# Altium PCB Main.PcbDoc
Units mm, origin at the board's own origin, x right, y up, seen from the top; angles counter-clockwise.
Board outline 99 x 99 mm, 4 copper layers (Top Layer, Ground Layer, Power Layer, Bottom Layer), stack 1.591 mm thick; 68 components, 49 nets, 281 pads, 50 vias.
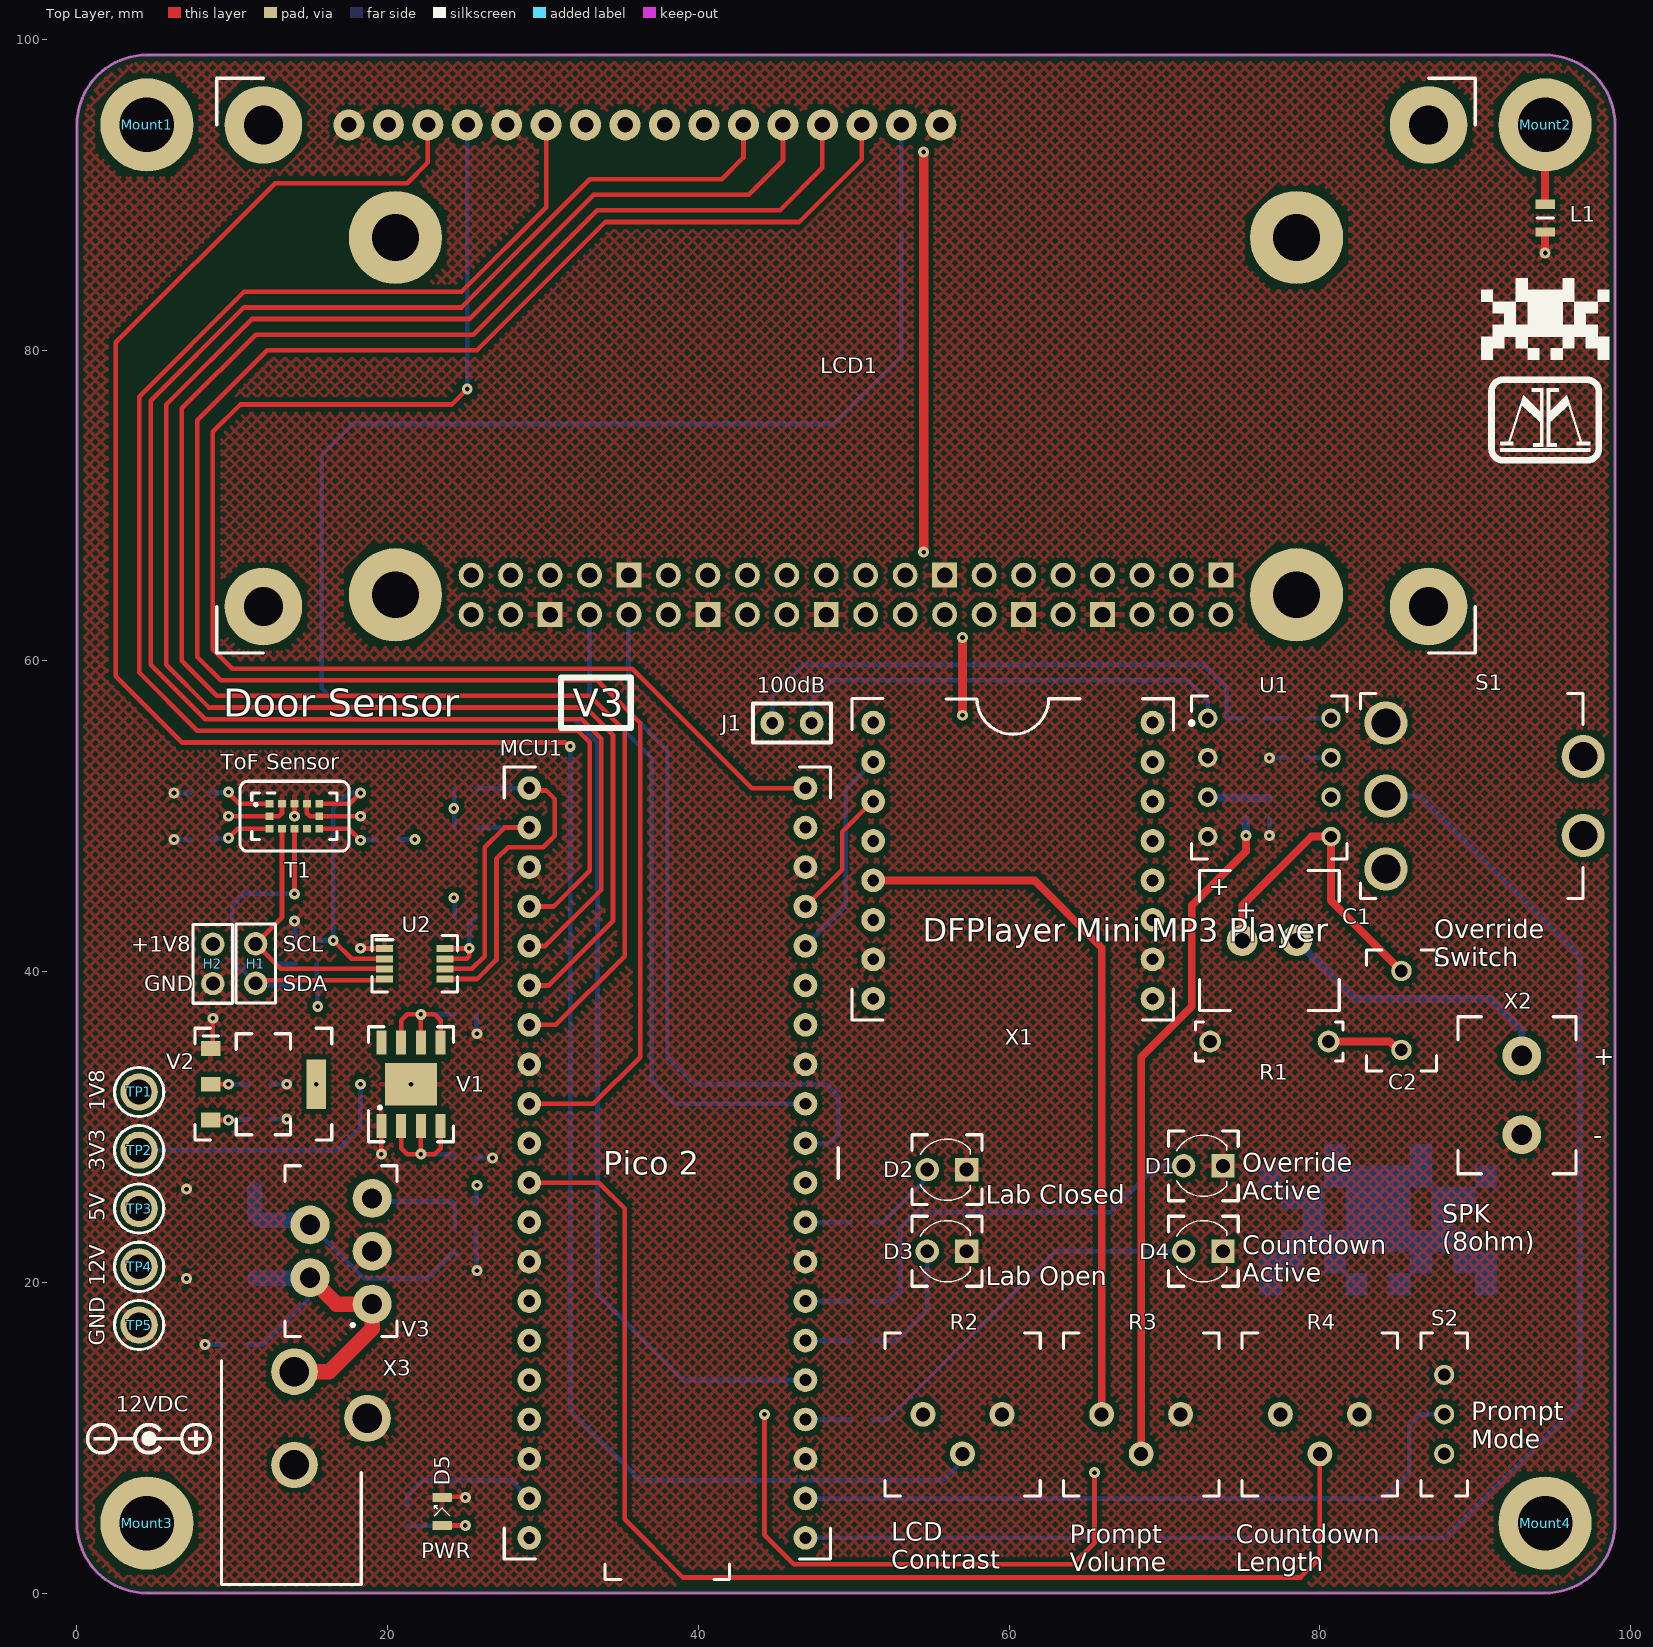
[diagram p0: Top Layer view]
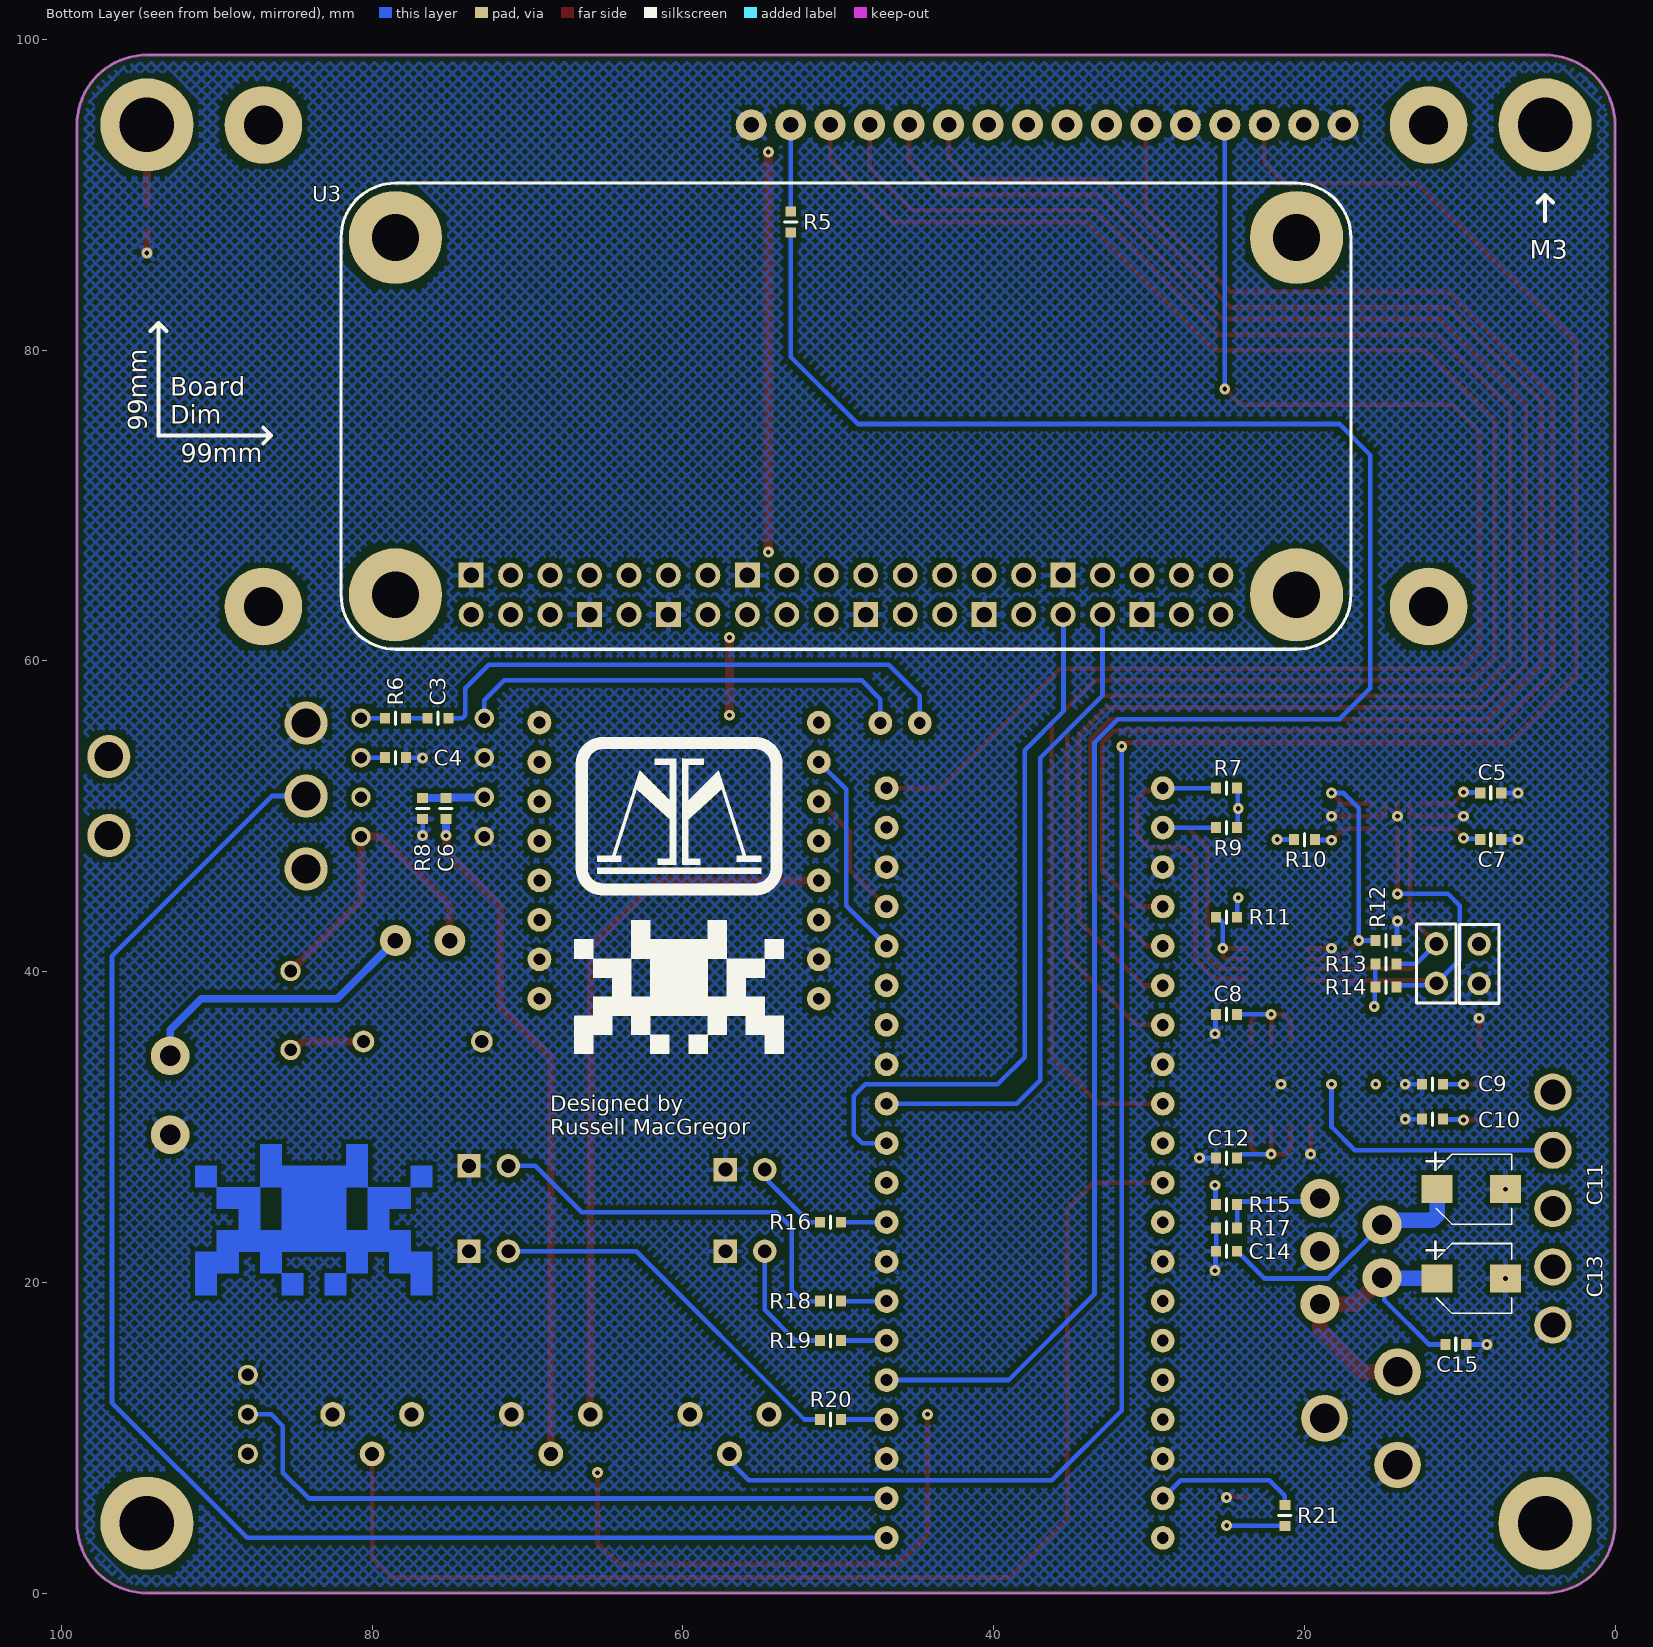
[diagram p1: Bottom Layer view, seen from below]
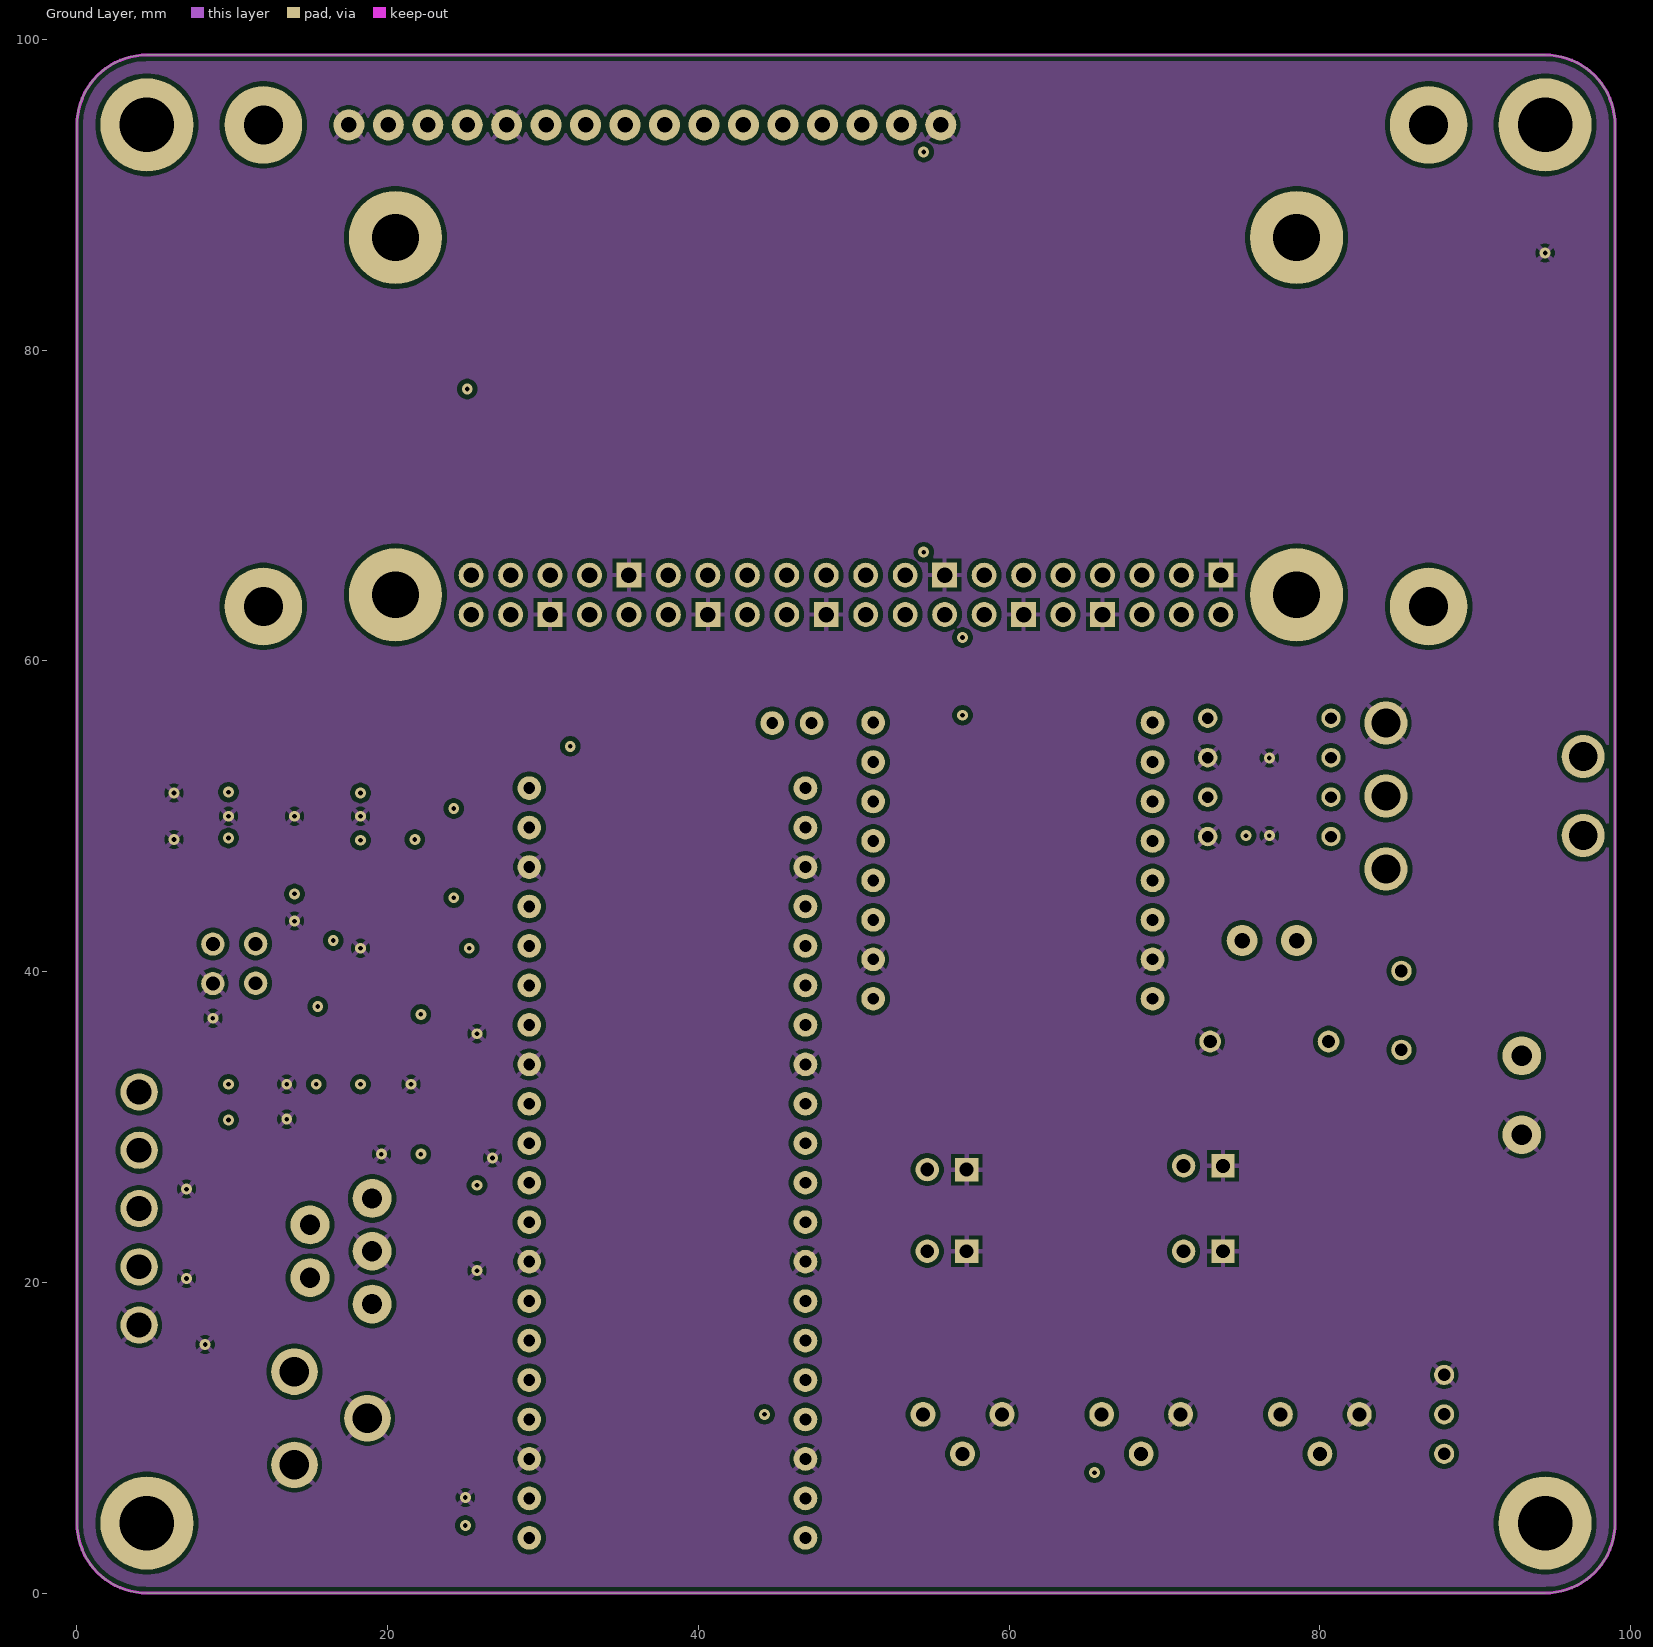
[diagram p2: Ground Layer]
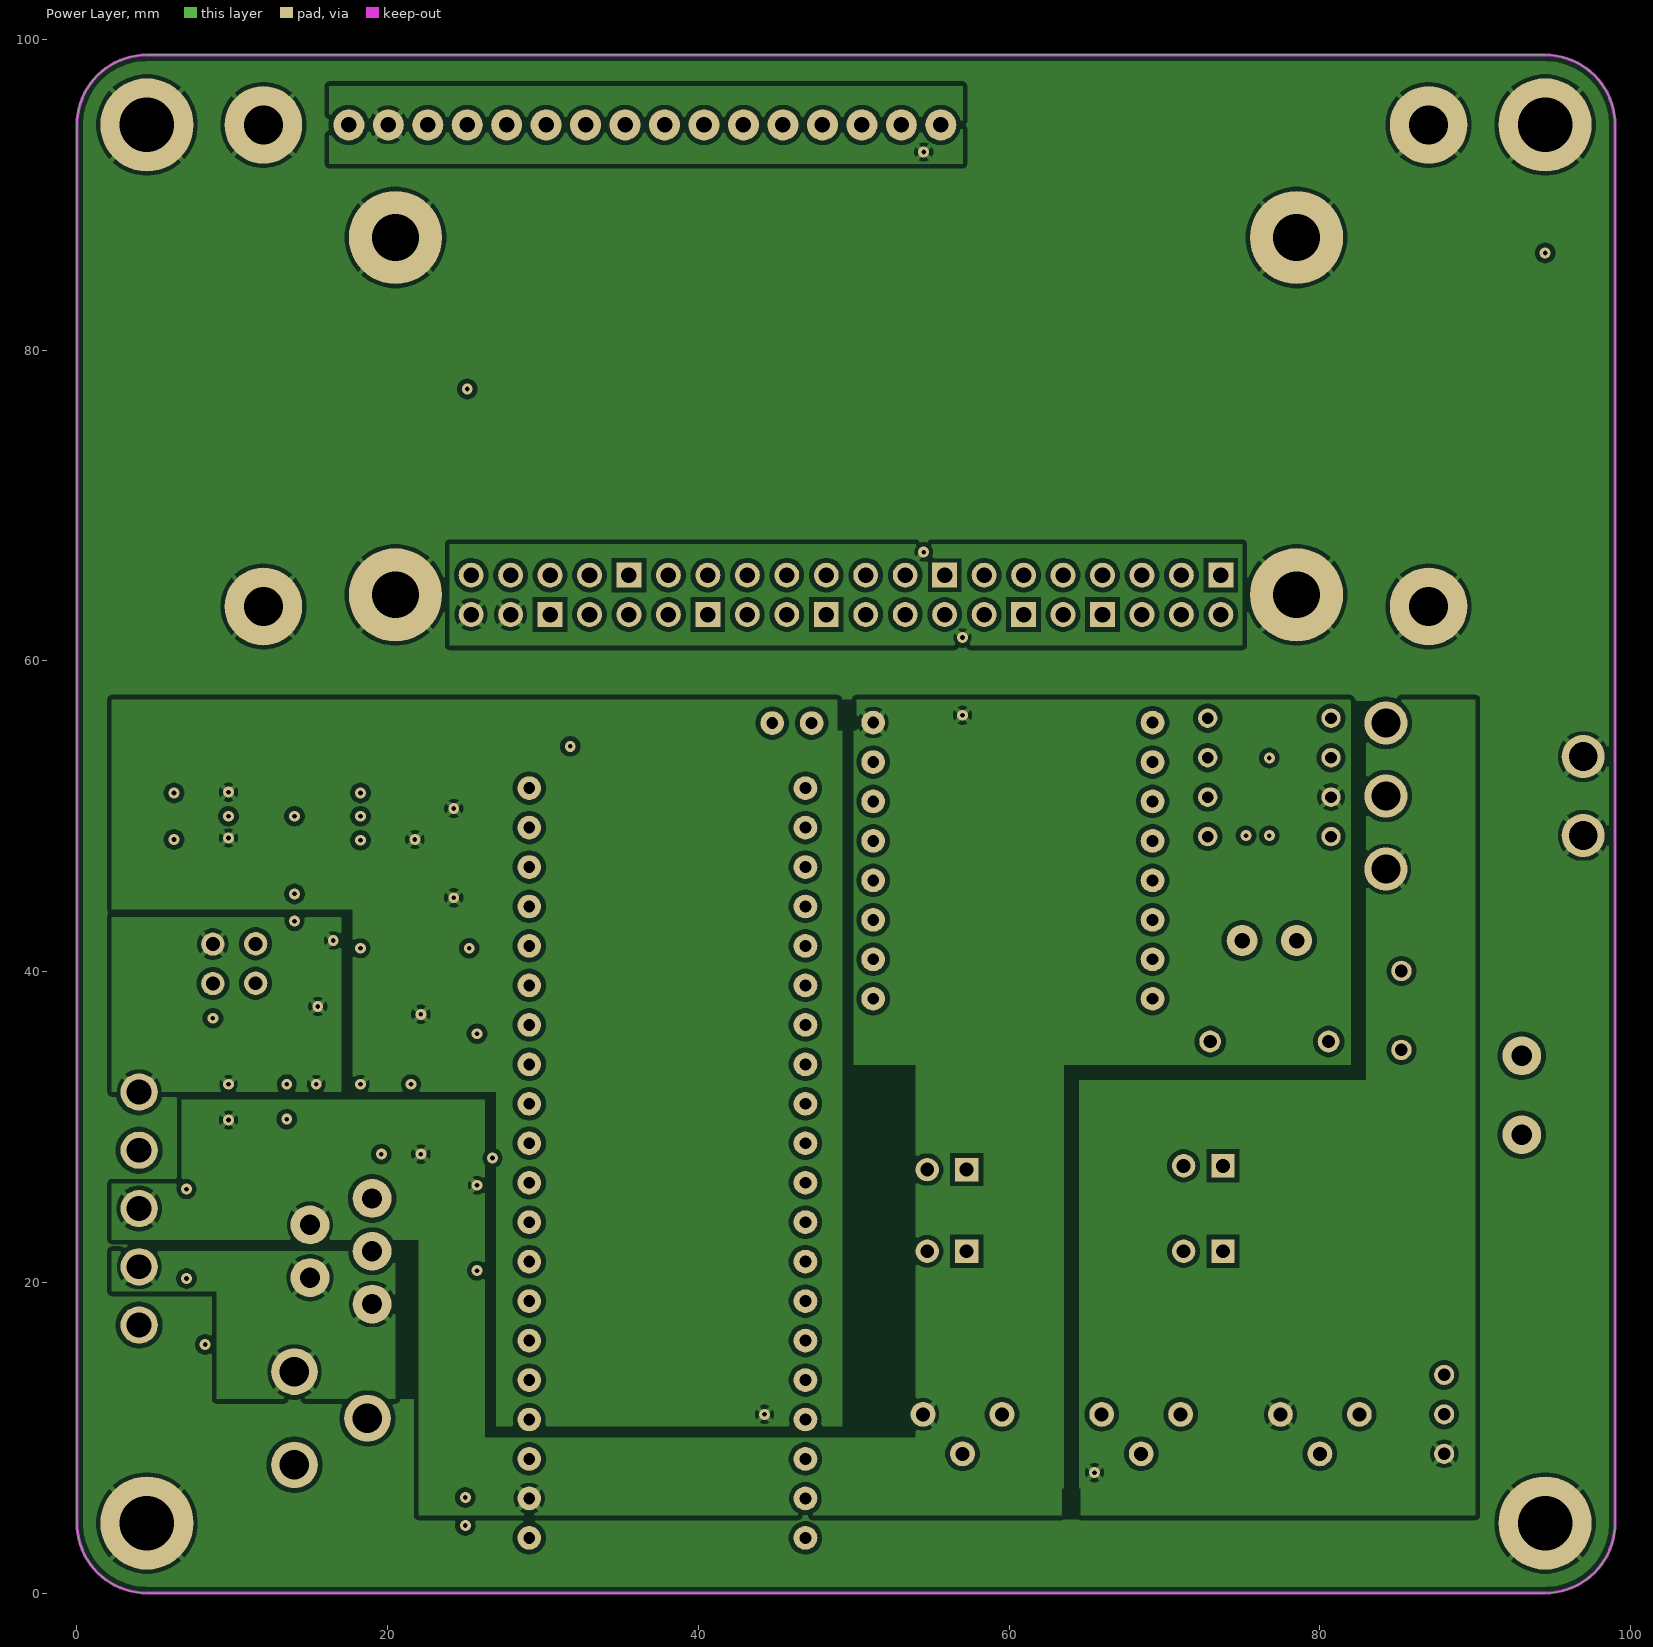
[diagram p3: Power Layer]

## Layer stack, top to bottom
Top Solder: solder mask 0.0102, Solder Resist, Dk 3.8
Top Layer: signal copper 0.035
Dielectric 2: prepreg 0.2104, 7628*1, Dk 4.4
Ground Layer: signal copper 0.0175
Dielectric 1: dielectric 1.065, FR-4, Dk 4.8
Power Layer: signal copper 0.0175
Dielectric 3: prepreg 0.2104, 7628*1, Dk 4.4
Bottom Layer: signal copper 0.035
Bottom Solder: solder mask 0.0102, Solder Resist, Dk 3.8

## Board outline
0,4.5 0,94.5 cw(c4.5,94.5) 4.5,99 94.5,99 cw(c94.5,94.5) 99,94.5 99,4.5 cw(c94.5,4.5) 94.5,0 4.5,0 cw(c4.5,4.5)

## Design rules (kind name [scope] priority, off if disabled: settings)
BoardOutlineClearance [All] p1: gap=0.2 ignorepadtopadclearanceinfootprint=FALSE
Clearance "inPolygon Clearance" [InPolygon] p1: gap=0.3 ignorepadtopadclearanceinfootprint=TRUE // this rule ensures that every net within a polygon of a different net has a set clearance from the poly
Clearance "Different Diff Pair" [All] p2: gap=0.2 ignorepadtopadclearanceinfootprint=TRUE
Clearance "Same Diff Pair" [All] p3: gap=0.1 ignorepadtopadclearanceinfootprint=TRUE
Clearance "Different Nets" [not InAnyDifferentialPair] p4: gap=0.3 ignorepadtopadclearanceinfootprint=TRUE except(0.1: Arc-SMDPad Arc-THPad Arc-Via Arc-Text Track-SMDPad Track-THPad Track-Via Track-Text SMDPad-Text THPad-Text Via-Text Fill-Text Poly-Text Region-Text Text-Text; 0.12: Arc-Arc Arc-Track Track-Track; 0.15: SMDPad-SMDPad SMDPad-THPad SMDPad-Via THPad-THPad THPad-Via Via-Via; 0.2: Arc-Hole Track-Hole SMDPad-Hole THPad-Hole Via-Hole Fill-Hole Poly-Hole Region-Hole Text-Hole)
Clearance "Same Net" [not InAnyDifferentialPair] p5: gap=0 ignorepadtopadclearanceinfootprint=TRUE except(0.1: THPad-Via; 0.18: Arc-Arc Arc-Track Track-Track)
ComponentClearance [All] p1: gap=0.102 collisioncheckmode=3 verticalgap=0.102 showdistances=TRUE
DiffPairsRouting "Ethernet Routing" [InDifferentialPairClass('Ethernet_Pairs')] p1: maxlimit=0.25 minlimit=0.2 mostfreqgap=0.25 toplayer_maxgap=0.2 toplayer_prefgap=0.2 toplayer_minwidth=0.25 toplayer_maxwidth=0.25 toplayer_prefwidth=0.25 midlayer1_mingap=0.25 midlayer1_minwidth=0.19 midlayer1_maxwidth=0.19 midlayer1_prefwidth=0.19 midlayer2_mingap=0.25 midlayer2_minwidth=0.19 midlayer2_maxwidth=0.19 midlayer2_prefwidth=0.19 bottomlayer_maxgap=0.2 bottomlayer_prefgap=0.2 bottomlayer_minwidth=0.25 bottomlayer_maxwidth=0.25 bottomlayer_prefwidth=0.25 impedanceprofiledriven=TRUE maxuncoupledlength=12.7
DiffPairsRouting "USB Routing" [InDifferentialPairClass('USB_Pairs')] p2: maxlimit=0.291 minlimit=0.127 mostfreqgap=0.291 toplayer_maxgap=0.127 toplayer_prefgap=0.127 toplayer_minwidth=0.23 toplayer_maxwidth=0.23 toplayer_prefwidth=0.23 midlayer1_mingap=0.291 midlayer1_minwidth=0.25 midlayer1_maxwidth=0.25 midlayer1_prefwidth=0.25 midlayer2_mingap=0.291 midlayer2_minwidth=0.25 midlayer2_maxwidth=0.25 midlayer2_prefwidth=0.25 bottomlayer_maxgap=0.127 bottomlayer_prefgap=0.127 bottomlayer_minwidth=0.23 bottomlayer_maxwidth=0.23 bottomlayer_prefwidth=0.23 impedanceprofiledriven=TRUE maxuncoupledlength=12.7
DiffPairsRouting "CAN Routing" [InDifferentialPairClass('CAN_Pairs')] p3: maxlimit=0.907 minlimit=0.5 mostfreqgap=0.907 toplayer_maxgap=0.5 toplayer_prefgap=0.5 toplayer_minwidth=0.201 toplayer_maxwidth=0.201 toplayer_prefwidth=0.201 midlayer1_mingap=0.907 midlayer1_minwidth=0.155 midlayer1_maxwidth=0.155 midlayer1_prefwidth=0.155 midlayer2_mingap=0.907 midlayer2_minwidth=0.155 midlayer2_maxwidth=0.155 midlayer2_prefwidth=0.155 bottomlayer_maxgap=0.5 bottomlayer_prefgap=0.5 bottomlayer_minwidth=0.201 bottomlayer_maxwidth=0.201 bottomlayer_prefwidth=0.201 maxuncoupledlength=12.7
Height [All] p1: minheight=0 maxheight=1816.048 prefheight=12.7
HoleSize [All] p1: absolutevalues=TRUE maxlimit=6.3 minlimit=0.3 maxpercent=80.000 minpercent=20.000
HoleToHoleClearance [All] p1: gap=0.25 allowstackedmicrovias=FALSE
Length [All] p1: maxlimit=43.432 minlimit=0 usedelayunits=TRUE mindelay=0.000000 maxdelay=10000.000000
MatchedLengths "Diff Pair Matched Delays" [InDifferentialPairClass('Ethernet_Pairs') or InDifferentialPairClass('USB_Pairs') or InDifferentialPairClass('CAN_Pairs')] p1: tolerance=5 checknetsindiffpair=TRUE checkdiffpairvsdiffpair=FALSE checkxsignals=FALSE checkothers=FALSE usedelayunits=TRUE delaytolerance=100.000000
MinimumAnnularRing [All] p1: minimumring=0.2
MinimumSolderMaskSliver [All] p1: minsoldermaskwidth=0
PlaneClearance "Supply Net Clearance" [InNetClass('Supply_Nets')] p1: clearance=0.5
PlaneClearance "All Nets" [All] p2: clearance=0.3
PolygonConnect "Supply Nets" [InNetClass('Supply_Nets')] p1: connectstyle=Relief reliefconductorwidth=0.3 reliefentries=4 polygonreliefangle="90 Angle" conductorbypadedge=TRUE mindistance=0.381 enablemindistance=FALSE airgapwidth=0.254
PolygonConnect General [All] p2: connectstyle=Relief reliefconductorwidth=0.254 reliefentries=4 polygonreliefangle="90 Angle" airgapwidth=0.254
RoutingVias [All] p1: holewidth=0.2 width=0.35 viastyle="Through Hole" minholewidth=0.15 minwidth=0.3 maxholewidth=6.3 maxwidth=6.55
SilkToSilkClearance [All] p1: silktosilkclearance=0
SilkToSolderMaskClearance [All] p1: minsilkscreentomaskgap=0 clearancetoexposedcopper=TRUE
SolderMaskExpansion [All] p1: expansion=0.075 istentingtop=FALSE
SupplyNets "Schematic Supply Nets_9" [InNet('+1V8')] p1: voltage=0.000
SupplyNets "Schematic Supply Nets_5" [InNet('+12V')] p2: voltage=0.000
SupplyNets "Schematic Supply Nets_3" [InNet('GND')] p3: voltage=0.000
SupplyNets "Schematic Supply Nets_2" [InNet('+5V')] p4: voltage=0.000
SupplyNets "Schematic Supply Nets_7" [InNet('+3V3')] p5: voltage=0.000
SupplyNets "Schematic Supply Nets_1" [InNet('Earth')] p6: voltage=0.000
UnRoutedNet [All] p1: checkbadconnections=TRUE
Width "nRF Width" [InNetClass('nRF Signal')] p1: maxlimit=0.379 minlimit=0.263 preferedwidth=0.379 toplayer_minwidth=0.379 midlayer1_maxwidth=0.263 midlayer1_prefwidth=0.263 midlayer2_maxwidth=0.263 midlayer2_prefwidth=0.263 bottomlayer_minwidth=0.379 impedanceprofiledriven=TRUE minimp=50.000000 maximp=50.000000 favimp=50.000000 checkconnectedcopper=TRUE
Width [All] p2: maxlimit=100 minlimit=0.1 preferedwidth=0.3
20 further rules are at their usual default settings.

## Classes and differential pairs
component class "Output Devices": C1 C2 C3 C4 C6 D1 D2 D3 D4 D5 J1 LCD1 R1 R2 R3 R5 R6 R8 R16 R18 R19 R20 R21 U1 X1
net class Supply_Nets: +1V8 +3V3 +5V +12V Earth GND NetR15_1
component class Power: C8 C9 C10 C11 C12 C13 C14 C15 R15 R17 TP1 TP2 TP3 TP4 TP5 V1 V2 V3
component class "Input Devices": C5 C7 H1 H2 R4 R7 R9 R10 R11 R12 R13 R14 S1 S2 T1 U2
component class Controllers: MCU1 U3
component class Connections: L1 Mount1 Mount2 Mount3 Mount4 X2 X3 X?

## Components (designator, comment, footprint, x,y, rotation, side; value= is the part's Value field where it differs from the comment)
C1 "[Cap] Thru-Hole 270uF 20% 35V" "[Cap] Thru-Hole Polarized 8mm" 76.75,42 r0 top
C2 "[Cap] Thru-Hole 47nF 20% 50V" "[Cap] Thru-Hole Nonpolarized Ceramic" 85.25,37.5 r90 top
C3 "[Cap] 0603 10uF 20% 16V" "[Cap] SMD 0603" 75.75,56.31 r0 bottom
C4 "[Cap] 0603 0.1uF 10% 16V" "[Cap] SMD 0603" 78.5,53.77 r180 bottom
C5 "[Cap] 0603 0.1uF 10% 16V" "[Cap] SMD 0603" 8,51.5 r0 bottom
C6 "[Cap] 0603 0.1uF 10% 16V" "[Cap] SMD 0603" 75.25,50.5 r270 bottom
C7 "[Cap] 0603 4.7uF 10% 25V" "[Cap] SMD 0603" 8,48.5 r0 bottom
C8 "[Cap] 0603 10uF 20% 16V" "[Cap] SMD 0603" 25,37.25 r180 bottom
C9 "[Cap] 0603 10uF 20% 16V" "[Cap] SMD 0603" 11.75,32.75 r180 bottom
C10 "[Cap] 0603 10uF 20% 16V" "[Cap] SMD 0603" 11.75,30.5 r180 bottom
C11 "[Cap] 4mm 47uF 20% 50V" "[Cap] SMD Polarized, 4mm" 9.25,26 r180 bottom
C12 "[Cap] 0603 0.1uF 10% 16V" "[Cap] SMD 0603" 25,28 r180 bottom
C13 "[Cap] 4mm 47uF 20% 50V" "[Cap] SMD Polarized, 4mm" 9.25,20.25 r180 bottom
C14 "[Cap] 0603 10uF 20% 16V" "[Cap] SMD 0603" 25,22 r180 bottom
C15 "[Cap] 0603 0.1uF 10% 16V" "[Cap] SMD 0603" 10.25,16 r0 bottom
D1 "[LED] Thru-Hole 3mm Yellow" "[LED] Thru-Hole 3mm Yellow" 72.5,27.5 r0 top
D2 "[LED] Thru-Hole 3mm Red" "[LED] Thru-Hole 3mm Red" 56,27.25 r0 top
D3 "[LED] Thru-Hole 3mm Green" "[LED] Thru-Hole 3mm Green" 56,22 r0 top
D4 "[LED] Thru-Hole 3mm White" "[LED] Thru-Hole 3mm White" 72.5,22 r0 top
D5 "[LED] SMD 0805 Green" "[LED] SMD 0805" 23.5,5.25 r90 top
H1 "1x2 Header" "[Header] 1x2 Male" 11.5,40.52 r90 top
H2 "1x2 Header" "[Header] 1x2 Male" 8.75,40.5 r270 top
J1 "[Jumper] Thru-Hole 2pin" "[Jumper] Thru-Hole 2pin" 47.29,56 r180 top
L1 "652-MH2029-300Y" "[Ferrite] SMD 0805" 94.5,88.5 r270 top
LCD1 "16x2, no I2C backpack" "[LCD] 16x2 Parallel" 9.5,61 r0 top
MCU1 "Pico 2" "[Pi] Pico 2" 38,2.18 r180 top
Mount1 "M3 Mount Hole" "[Mount] M3 Mount Hole" 4.5,94.5 r0 top
Mount2 "M3 Mount Hole" "[Mount] M3 Mount Hole" 94.5,94.5 r0 top
Mount3 "M3 Mount Hole" "[Mount] M3 Mount Hole" 4.5,4.5 r0 top
Mount4 "M3 Mount Hole" "[Mount] M3 Mount Hole" 94.5,4.5 r0 top
R1 "[10] Thru-Hole 5% 1/4W" "[Res] Thru-Hole 1/4W" 76.75,35.5 r0 top
R2 "0-10k, 0.5W" "[Potentiometer] 10k 0.5W (2)" 57,11.5 r0 top
R3 "0-10k, 0.5W" "[Potentiometer] 10k 0.5W (2)" 68.5,11.5 r0 top
R4 "0-10k, 0.5W" "[Potentiometer] 10k 0.5W (2)" 80,11.5 r0 top
R5 "[100] SMD 0603 1% 1/10W" "[Res] SMD 0603" 53.06,88.25 r90 bottom
R6 "[680] SMD 0603 1% 1/8W" "[Res] SMD 0603" 78.5,56.31 r0 bottom
R7 "[10k] SMD 0603 1% 1/8W" "[Res] SMD 0603" 25,51.81 r180 bottom
R8 "[15k] SMD 0603 1% 1/8W" "[Res] SMD 0603" 76.75,50.5 r90 bottom
R9 "[10k] SMD 0603 1% 1/8W" "[Res] SMD 0603" 25,49.27 r180 bottom
R10 "[10k] SMD 0603 1% 1/8W" "[Res] SMD 0603" 20,48.5 r0 bottom
R11 "[200k] SMD 0603 1% 1/10W" "[Res] SMD 0603" 25,43.5 r0 bottom
R12 "[300k] SMD 0603 1% 1/10W" "[Res] SMD 0603" 14.75,42 r0 bottom
R13 "[10k] SMD 0603 1% 1/8W" "[Res] SMD 0603" 14.75,40.5 r0 bottom
R14 "[10k] SMD 0603 1% 1/8W" "[Res] SMD 0603" 14.75,39 r0 bottom
R15 "[10k] SMD 0603 1% 1/8W" "[Res] SMD 0603" 25,25 r0 bottom
R16 "[220] SMD 0603 1% 1/10W" "[Res] SMD 0603" 50.5,23.87 r0 bottom
R17 "[3.3k] SMD 0603 1% 1/10W" "[Res] SMD 0603" 25,23.5 r180 bottom
R18 "[220] SMD 0603 1% 1/10W" "[Res] SMD 0603" 50.5,18.79 r0 bottom
R19 "[220] SMD 0603 1% 1/10W" "[Res] SMD 0603" 50.5,16.25 r0 bottom
R20 "[220] SMD 0603 1% 1/10W" "[Res] SMD 0603" 50.5,11.17 r0 bottom
R21 "[220] SMD 0603 1% 1/10W" "[Res] SMD 0603" 21.25,5 r270 bottom
S1 "[SPDT] Toggle" "[SPDT] Toggle" 84.25,51.3 r270 top
S2 "[SPDT] Slide Switch" "[SPDT] Slide Switch" 88,11.5 r270 top
T1 "[ToF] VL53L1X" "[ToF] VL53L1X" 14,50 r0 top
TP1 "[THM] Thru-Hole" "[THM] White" 4,32.25 r0 top
TP2 "[THM] Thru-Hole" "[THM] White" 4,28.5 r0 top
TP3 "[THM] Thru-Hole" "[THM] White" 4,24.75 r0 top
TP4 "[THM] Thru-Hole" "[THM] White" 4,21 r0 top
TP5 "[THM] Thru-Hole" "[THM] White" 4,17.25 r0 top
U1 "LM386" "[Amp] LM386" 76.75,52.5 r0 top
U2 "[Level Shifter] I2C Level Shifter" "[Level Shifter] I2C Level Shifter" 21.75,40.5 r0 top
U3 "RP Zero 2W" "[Pi] Zero 2W" 17,90.75 r0 bottom
V1 "3V3 1.5A" "[Linear] 3V3 1.5A" 21.5,32.75 r90 top
V2 "[Linear] 1.8V 1A" "[Linear] 1.8V 1A" 12,32.75 r0 top
V3 "[Linear] 1.25-25V 3A" "[Linear] 1.25-25V 3A" 19,22 r90 top
X1 "[MP3] DFPlayer Mini MP3 Player" "[MP3] DFPlayer Mini MP3 Player" 51.25,38.25 r0 top
X2 "2pin Screw Terminal" "[Screw Terminal] 2pin 5mm" 93,32 r90 top
X3 "[Barrel] DC Jack 2mmID" "[Barrel] DC Jack" 14,8.25 r0 top

## Footprints (in the part's own frame and the unit in brackets; to place one, negate y for a bottom-side part, rotate by r counter-clockwise, add the part's x,y. Pads: shape width x height; smd on the part's side, far side on the other; paste and mask are expansions set on the pad)
"[Amp] LM386" [mm] "LM386N-1/NOPB"
  round 1.25 hole 0.75: 1(-3.969,3.81) 2(-3.969,1.27) 3(-3.969,-1.27) 4(-3.969,-3.81) 5(3.969,-3.81) 6(3.969,-1.27) 7(3.969,1.27) 8(3.969,3.81)
  silkscreen extent -5.1,-5.25 5,5.25, body extent -4.1,-5.08 4.1,5.08, height 3.94
"[Barrel] DC Jack" [mm]
  round 3 hole 1.9: 1(0,6) 2(0,0) 3(4.7,3)
  silkscreen extent -4.7,-7.7 4.3,6.7, body extent -4.42,-7.7 4.98,6.7, height 11.04
"[Cap] SMD 0603" [mm]
  rect 0.65x0.7 smd: 1(-0.675,0) 2(0.675,0)
  silkscreen extent 0,-0.4 0,0.4, body extent -0.8,-0.45 0.8,0.45, height 0.8
"[Cap] SMD Polarized, 4mm" [mm]
  rect 2x1.8 smd: 1(-2.2,0) 2(2.2,0)
  silkscreen extent -2.25,-2.25 2.6,2.25, body extent -2.6,-2.25 2.6,2.25, height 5.66
"[Cap] Thru-Hole Nonpolarized Ceramic" [mm]
  round 1.316 hole 0.81: 1(-2.54,0) 2(2.54,0)
  silkscreen extent -3.9,-2.25 3.9,2.25, body extent -3.55,-2.04 3.56,2.04, height 10.23
"[Cap] Thru-Hole Polarized 8mm" [mm]
  round 2 hole 1: 1(-1.75,0) 2(1.75,0)
  silkscreen extent -4.5,-4.5 4.5,4.5, body extent -4.24,-4.25 4.24,4.25, height 17.5
"[Ferrite] SMD 0805" [mm]
  rect 0.6x1.25 smd: 1(-0.9,0) 2(0.9,0)
  silkscreen extent 0,-0.53 0,0.53, body extent -1,-0.6 1,0.6, height 1.1
"[Header] 1x2 Male" [mm]
  round 1.5 hole 0.9: 1(-1.27,0) 2(1.27,0)
  silkscreen extent -2.54,-1.27 2.54,1.27, body extent -2.54,-1.27 2.54,1.27, height 9.5
"[Jumper] Thru-Hole 2pin" [mil]
  round 60 hole 30: 1(0,0) 2(100,0)
  silkscreen extent -49,-49 149,49, body extent -50,-50 150,50, height 374
"[LCD] 16x2 Parallel" [mm]
  round 2 hole 1: 1(8,33.5) 2(10.54,33.5) 3(13.08,33.5) 4(15.62,33.5) 5(18.16,33.5) 6(20.7,33.5) 7(23.24,33.5) 8(25.78,33.5) 9(28.32,33.5) 10(30.86,33.5) 11(33.4,33.5) 12(35.94,33.5) 13(38.48,33.5) 14(41.02,33.5) 15(43.56,33.5) 16(46.1,33.5)
  round 5 hole 2.5: MH(2.5,2.5) MH(2.5,33.5) MH(77.5,2.5) MH(77.5,33.5)
  silkscreen extent -0.5,-0.5 80.5,36.5, body extent 0,0 80,36, height 10.9
"[LED] SMD 0805" [mm]
  rrect20% 0.6x1.25 smd: 1(-0.9,0) 2(0.9,0)
  silkscreen extent -0.28,-0.51 0.37,0.51, body extent -1,-0.65 1,0.65, height 0.8
"[LED] Thru-Hole 3mm Green" [mm]
  round 1.5 hole 0.9: 1(-1.27,0)
  rect 1.5x1.5 hole 0.9: 2(1.27,0)
  silkscreen extent -2.25,-2.25 2.25,2.25, body extent -1.9,-1.92 1.68,1.92, height 5.6
"[LED] Thru-Hole 3mm Red" [mm]
  round 1.5 hole 0.9: 1(-1.27,0)
  rect 1.5x1.5 hole 0.9: 2(1.27,0)
  silkscreen extent -2.25,-2.25 2.25,2.25, body extent -1.88,-1.92 1.68,1.92, height 5.6
"[LED] Thru-Hole 3mm White" [mm]
  round 1.5 hole 0.9: 1(-1.27,0)
  rect 1.5x1.5 hole 0.9: 2(1.27,0)
  silkscreen extent -2.25,-2.25 2.25,2.25, body extent -1.88,-1.92 1.68,1.92, height 5.6
"[LED] Thru-Hole 3mm Yellow" [mm]
  round 1.5 hole 0.9: 1(-1.27,0)
  rect 1.5x1.5 hole 0.9: 2(1.27,0)
  silkscreen extent -2.25,-2.25 2.25,2.25, body extent -1.88,-1.92 1.68,1.92, height 5.6
"[Level Shifter] I2C Level Shifter" [mm] "PCA9306DCTR"
  rect 1.1x0.45 smd: 1(-1.95,0.975) 2(-1.95,0.325) 3(-1.95,-0.325) 4(-1.95,-0.975) 5(1.95,-0.975) 6(1.95,-0.325) 7(1.95,0.325) 8(1.95,0.975)
  silkscreen extent -2.75,-1.83 2.75,1.83, body extent -2,-1.48 2,1.48, height 1.3
"[Linear] 1.8V 1A" [mm] "NCP1117IST18T3G"
  rect 1.25x0.95 smd: 1(-3.4,2.3) 2(-3.4,0) 3(-3.4,-2.3)
  rect 1.25x3.2 smd: 2(3.4,0)
  silkscreen extent -4.4,-3.6 4.4,3.6, body extent -3.5,-3.25 3.5,3.25, height 1.8
"[Linear] 1.25-25V 3A" [mm] "MIC29302WT"
  round 2.5 hole 1.3: 1(-3.4,0) 2(-1.7,4) 3(0,0) 4(1.7,4) 5(3.4,0)
  silkscreen extent -5.5,-1.6 5.5,5.6, body extent -5.12,-0.13 5.11,8.58, height 21.54
"[Linear] 3V3 1.5A" [mm]
  rect 1.525x0.65 smd: 1(-2.688,1.905) 2(-2.688,0.635) 3(-2.688,-0.635) 4(-2.688,-1.905) 5(2.688,-1.905) 6(2.688,-0.635) 7(2.688,0.635) 8(2.688,1.905)
  rect 2.71x3.35 smd: 9(0,0)
  silkscreen extent -3.7,-2.73 3.7,2.73, body extent -3,-2.45 3,2.45, height 1.5
"[Mount] M3 Mount Hole" [mm]
  round 6 hole 3.5: 1(0,0)
"[MP3] DFPlayer Mini MP3 Player" [mil]
  round 60 hole 30: 1(0,700) 2(0,600) 3(0,500) 4(0,400) 5(0,300) 6(0,200) 7(0,100) 8(0,0) 9(707.87,0) 10(707.87,100) 11(707.87,200) 12(707.87,300) 13(707.87,400) 14(707.87,500) 15(707.87,600) 16(707.87,700)
  silkscreen extent -54,-54 761,761, body extent -51,-164 768,760, height 236
"[Pi] Pico 2" [mil]
  round 60 hole 30: 1(-350,-53.94) 2(-350,-153.94) 3(-350,-253.94) 4(-350,-353.94) 5(-350,-453.94) 6(-350,-553.94) 7(-350,-653.94) 8(-350,-753.94) 9(-350,-853.94) 10(-350,-953.94) 11(-350,-1053.94) 12(-350,-1153.94) 13(-350,-1253.94) 14(-350,-1353.94) 15(-350,-1453.94) 16(-350,-1553.94) 17(-350,-1653.94) 18(-350,-1753.94) 19(-350,-1853.94) 20(-350,-1953.94) 21(350,-1953.94) 22(350,-1853.94) 23(350,-1753.94) 24(350,-1653.94) 25(350,-1553.94) 26(350,-1453.94) 27(350,-1353.94) 28(350,-1253.94) 29(350,-1153.94) 30(350,-1053.94) 31(350,-953.94) 32(350,-853.94) 33(350,-753.94) 34(350,-653.94) 35(350,-553.94) 36(350,-453.94) 37(350,-353.94) 38(350,-253.94) 39(350,-153.94) 40(350,-53.94)
  silkscreen extent -433,-2008 413,51, body extent -413,-2008 413,43, height 287
"[Pi] Zero 2W" [mm]
  round 1.6 hole 1: 1(8.37,25.23) 3(10.91,25.23) 5(13.45,25.23) 7(15.99,25.23) 8(15.99,27.77) 10(18.53,27.77) 11(21.07,25.23) 12(21.07,27.77) 13(23.61,25.23) 15(26.15,25.23) 16(26.15,27.77) 17(28.69,25.23) 18(28.69,27.77) 19(31.23,25.23) 21(33.77,25.23) 22(33.77,27.77) 23(36.31,25.23) 24(36.31,27.77) 26(38.85,27.77) 27(41.39,25.23) 28(41.39,27.77) 29(43.93,25.23) 31(46.47,25.23) 32(46.47,27.77) 33(49.01,25.23) 35(51.55,25.23) 36(51.55,27.77) 37(54.09,25.23) 38(54.09,27.77) 40(56.63,27.77) +5V(8.37,27.77) +5V(10.91,27.77)
  rect 1.6x1.6 hole 1: GND(13.45,27.77) GND(18.53,25.23) GND(23.61,27.77) GND(31.23,27.77) GND(38.85,25.23) GND(43.93,27.77) GND(49.01,27.77) GND(56.63,25.23)
  round 6 hole 3: MH(3.5,3.5) MH(3.5,26.5) MH(61.5,3.5) MH(61.5,26.5)
  silkscreen extent 0,0 65,30, body extent 0,-0.58 65.8,30, height 13.25
"[Potentiometer] 10k 0.5W (2)" [mm]
  round 1.6 hole 0.9: 1(-2.54,0) 2(0,-2.54) 3(2.54,0)
  silkscreen extent -5,-5.25 5,5.25, body extent -4.79,-4.9 4.79,4.93, height 10.41
"[Res] SMD 0603" [mm]
  rect 0.65x0.7 smd: 1(-0.675,0) 2(0.675,0)
  silkscreen extent 0,-0.4 0,0.4, body extent -0.8,-0.45 0.8,0.45, height 0.8
"[Res] Thru-Hole 1/4W" [mm]
  round 1.4 hole 0.85: 1(-3.81,0) 2(3.81,0)
  silkscreen extent -4.75,-1.25 4.75,1.25, body extent -4.11,-1.19 4.11,1.19, height 2.7
"[Screw Terminal] 2pin 5mm" [mm]
  round 2.5 hole 1.3: 1(-2.5,0) 2(2.58,0)
  silkscreen extent -5.01,-3.5 5.09,4.1, body extent -5.45,-3.5 5.05,4.1, height 9.99
"[SPDT] Slide Switch" [mm]
  round 1.3 hole 0.8: 1(-2.54,0) 2(0,0) 3(2.54,0)
  silkscreen extent -5.25,-1.5 5.25,1.5, body extent -5.03,-1.25 4.97,1.25, height 7.8
"[SPDT] Toggle" [mm] "ANT11TFHQE"
  round 2.775 hole 1.85: 1(-4.7,0) 2(0,0) 3(4.7,0) X(-2.54,12.7) X(2.54,12.7)
  silkscreen extent -6.6,-1.64 6.6,12.7, body extent -6.35,-0.64 6.35,26.51, height 6.86
"[THM] White" [mm] "5012"
  round 2.4 hole 1.6: 1(0,0)
  silkscreen extent -1.59,-1.58 1.59,1.58, body extent -1.58,-1.59 1.58,1.59, height 8.12
"[ToF] VL53L1X" [mm] "VL53L1CXV0FY/1"
  rect 0.5x0.5 smd: 1(-1.6,0.8) 2(-0.8,0.8) 5(1.6,0.8) 7(1.6,-0.8) 8(0.8,-0.8) 9(0,-0.8) 10(-0.8,-0.8) 11(-1.6,-0.8) GND(-1.6,0) GND(0,0.8) GND(0.8,0.8) GND(1.6,0)
  silkscreen extent -2.75,-1.5 2.75,1.5, body extent -2.45,-1.25 2.45,1.25, height 1.6

## Part data
C1: "35ZLH270MEFC8X16", Capacitance=270uF, Max Voltage=35V, Size Package=Thru-Hole, Supplier Part Number 1=1189-1748-ND, Tolerance=20%, Supplier 1=DigiKey
C2: "C317C473M5U5TA", Capacitance=47nF, Max Voltage=50V, Size Package=Thru-Hole, Supplier Part Number 1=399-4246-ND, Tolerance=20%, Supplier 1=DigiKey
C3 C8 C9 C10 C14: "GRM188C81C106MA73D", Capacitance=10uF, Max Voltage=16V, Size Package=0603, Supplier Part Number 1=490-7198-1-ND, Tolerance=20%, Supplier 1=DigiKey
C4 C5 C6 C12 C15: "CC0603KRX7R7BB104", Capacitance=100nF, Max Voltage=16V, Size Package=0603, Supplier Part Number 1=311-1088-6-ND, Tolerance=10%, Supplier 1=DigiKey
C7: "GRM188R61E475KE11D", Capacitance=4.7uF, Max Voltage=25V, Size Package=0603, Supplier Part Number 1=490-7203-6-ND, Tolerance=10%, Supplier 1=DigiKey
C11 C13: "EEE-FN1A470UR", Capacitance=47uF, Max Voltage=50V, Size Package=4mm, Supplier Part Number 1=10-EEE-FN1A470URCT-ND, Tolerance=20%, Supplier 1=DigiKey
D1: "151031YS05900", Color=Yellow, Supplier Part Number 1=732-5009-ND, Lens Diameter=3mm, Supplier 1=DigiKey
D2: "151031SS06000", Color=Red, Supplier Part Number 1=732-5006-ND, Lens Diameter=3mm, Supplier 1=DigiKey
D3: "151031VS06000", Color=Green, Supplier Part Number 1=732-5008-ND, Lens Diameter=3mm, Supplier 1=DigiKey
D4: "151031VS06000", Color=White, Supplier Part Number 1=1516-QBL7IW60D-WW-ND, Lens Diameter=3mm, Supplier 1=DigiKey
D5: "LG R971-KN-1-0-20-R18", Color=Green, Size Package=0805, Supplier Part Number 1=475-LGR971-KN-1CT-ND, Supplier 1=DigiKey
H1 H2: library part "[Header] 1x2 Male", "2.54mm pitch"
L1: library part "[Ferrite] SMD 0805 3A 30ohm", Res @ Freq="30 @ 100MHz", Size Package=0805, Supplier Part Number 1=MH2029-300YCT-ND, Supplier 1=DigiKey
LCD1: library part "[LCD] 16x2 Parallel", "Sunfounder"
MCU1: library part "[Pi] Pico 2", "SC1631", Supplier Part Number 1=2648-SC1631TR-ND, Supplier 1=DigiKey
Mount1 Mount2 Mount3 Mount4: library part "[Mount] M3 Mount Hole", "Place at least 4.5mm from board edge. Plated."
R1: "CFR-25JT-52-10R", Resistance=10, Size Package=Thru-Hole, Supplier Part Number 1=13-CFR-25JT-52-10RCT-ND, Tolerance=5%, Supplier 1=DigiKey, Wattage=1/4W
R2 R3 R4: library part "[Potentiometer] 10k 0.5W", "3386T-1-103LF", Supplier Part Number 1=118-3386T-1-103LF-ND, Supplier 1=DigiKey
R5: "RC0603FR-07100RL", Resistance=100, Size Package=0603, Supplier Part Number 1=311-100HRDKR-ND, Tolerance=1%, Supplier 1=DigiKey, Wattage=1/10W
R6: "CRCW0603680RFKEA", Resistance=680, Size Package=0603, Supplier Part Number 1=541-680HCT-ND, Tolerance=1%, Supplier 1=DigiKey, Wattage=1/8W
R7 R9 R13 R14: "RMCF0603FT10K0", Resistance=10k, Size Package=0603, Supplier Part Number 1=RMCF0603FT10K0DKR-ND, Tolerance=1%, Supplier 1=DigiKey, Wattage=1/10W
R8: "CRCW060315K0FKEA", Resistance=15k, Size Package=0603, Supplier Part Number 1=541-15.0KHCT-ND, Tolerance=1%, Supplier 1=DigiKey, Wattage=1/8W
R10 R15: "RC0805JR-0710KL", Resistance=10k, Size Package=0805, Supplier Part Number 1=311-10KARCT-ND, Tolerance=5%, Supplier 1=DigiKey, Wattage=1/8W
R11: "RC0603JR-07200KL", Resistance=200k, Size Package=0603, Supplier Part Number 1=311-200KGRCT-ND, Tolerance=5%, Supplier 1=DigiKey, Wattage=1/10W
R12: "CRCW0603300KFKEA", Resistance=300k, Size Package=0603, Supplier Part Number 1=541-300KHCT-ND, Tolerance=1%, Supplier 1=DigiKey, Wattage=1/8W
R16 R18 R19 R20 R21: "CRGCQ0805F220R", Resistance=220, Size Package=0603, Supplier Part Number 1=A129741CT-ND, Tolerance=1%, Supplier 1=DigiKey, Wattage=1/8W
R17: "RC0603FR-073K3L", Resistance=3.3k, Size Package=0603, Supplier Part Number 1=311-3.30KHRCT-ND, Tolerance=1%, Supplier 1=DigiKey, Wattage=1/10W
S1: "ANT11TFHQE", Supplier Part Number 1=2449-ANT11TFHQE-ND, Supplier 1=DigiKey
S2: "09.03290.01", Supplier Part Number 1=1948-1087-ND, Supplier 1=DigiKey
T1: "VL53L1CXV0FY/1", Supplier Part Number 1=497-17764-1-ND, Supplier 1=DigiKey
TP1 TP2 TP3 TP4 TP5: "5012", Supplier Part Number 1=36-5012-ND, Supplier 1=DigiKey
U1: library part "[Amp] LM386", "LM386N-1/NOPB", Supplier Part Number 1=296-44414-5-ND, Supplier 1=DigiKey
U2: "PCA9306DCTR", Supplier Part Number 1=296-18509-1-ND, Supplier 1=DigiKey
U3: library part "[Pi] Zero 2W"
V1: library part "[Linear] 3V3 1.5A", "AP7362A-33SP-13", Supplier Part Number 1=AP7362A-33SP-13DICT-ND, Supplier 1=DigiKey
V2: "NCP1117IST18T3G", Supplier Part Number 1=488-NCP1117IST18T3GCT-ND, Supplier 1=DigiKey
V3: "MIC29302WT", Supplier Part Number 1=576-1124-ND, Supplier 1=DigiKey
X1: "DFR0299", Supplier Part Number 1=1738-1041-ND, Supplier 1=DigiKey
X2: library part "[Screw Terminal] 2pin", "TB002-500-02BE", Supplier Part Number 1=102-6145-ND, Supplier 1=DigiKey
X3: "PJ-102A", Supplier Part Number 1=CP-102A-ND, Supplier 1=DigiKey

## Via types
v1: diameter 0.7, hole 0.3, Top Layer to Bottom Layer, 50 vias

## Nets (pads, with @x,y where several pads share a name; then routed paths per layer and width w, separated by ;. In a path a pad name is that pad's centre, name@x,y a point inside that pad or via, vN(x,y) a via of type N, cw(c..) or ccw(c..) an arc to the next point about the centre after c; other vN are vias at no path point)
1V8_SCL: H1.2 R13.1 T1.10 U2.3 | length 20.2
  Top Layer w0.3: T1.10 13.2,43.49 H1.2 13.115,40.175 U2.3
  Bottom Layer w0.3: H1.2 12.79,40.5 R13.1
1V8_SDA: H1.1 R14.1 T1.9 U2.4 | length 25.2
  Top Layer w0.3: H1.1 11.7,39.45 19.725,39.45 U2.4 ; v1(14,45) T1.9
  Bottom Layer w0.3: v1(14,45) 10.75,45 10,44.25 10,40.75 H1.1 11.625,39.125 13.95,39.125 R14.1
3V3_SCL: MCU1.22 R9.1 U2.6 | length 16.7
  Top Layer w0.3: U2.6 25.425,40.175 26.25,41 26.25,48 27.52,49.27 MCU1.22
  Bottom Layer w0.3: R9.1@25.675,49.25 25.685,49.26 29.1,49.26 MCU1.22
3V3_SDA: MCU1.21 R7.1 U2.5 | length 22.4
  Top Layer w0.3: U2.5 25.775,39.525 27,40.75 27,47.25 27.75,48 30,48 30.75,48.75 30.75,51.109 30.202,51.657 29.263,51.657 MCU1.21
  Bottom Layer w0.3: R7.1 MCU1.21
+1V8: C9.2 H2.1 R12.2 R13.2 R14.2 T1.5 TP1.1 U2.2 V2.2 | length 23.7
  Top Layer w0.3: V2.2@8.6,32.75 v1(9.75,32.75) ; T1.5 17.55,50.8 v1(18.25,51.5) ; v1(16.5,42) 17.675,40.825 U2.2
  Bottom Layer w0.3: v1(9.75,32.75) C9.2 ; R13.2 R14.2 15.462,38.963 15.462,37.787 v1(15.5,37.75) ; R12.2 v1(16.5,42) 16.5,50.5 17.5,51.5 v1(18.25,51.5)
  other v1: 15.4,32.75
+3V3: C5.2 C7.2 C8.2 R4.1 R7.2 R9.2 R10.2 R11.1 S1.3 S2.3 T1.1 T1.11 TP2.1 V1.5 V1.6 V1.7 | length 75.3
  Top Layer w0.3: v1@9.725,51.525 10.45,50.8 T1.1 ; v1(9.75,48.6) 10.35,49.2 T1.11 ; V1.7 20.865,36.865 21.25,37.25 v1(22.135,37.25) ; V1.6 v1(22.135,37.25) ; V1.5 23.405,36.865 23.02,37.25 v1(22.135,37.25) ; v1(44.25,11.5) 44.25,3.75 46.151,1.849 64.099,1.849 65.5,3.25 v1(65.5,7.75)
  Bottom Layer w0.3: TP2.1 16.75,28.5 18.25,30 v1(18.25,32.75) ; C7.2 8.725,48.55 9.7,48.55 v1(9.75,48.6) ; C5.2 8.7,51.525 9.725,51.525 v1(9.75,51.55) ; R10.2 v1(21.75,48.5) ; v1(22.135,37.25) C8.2 ; v1(24.25,44.75) 24.325,44.75 R11.1 ; R9.2 24.288,49.308 24.288,50.463 v1(24.25,50.5) 24.288,50.538 24.288,51.772 R7.2
+5V: C10.2 C11.1 C12.2 C14.2 LCD1.2 MCU1.39 R2.1 R15.2 R21.1 TP3.1 U1.6 U3.+5V V1.2 V1.3 V1.4 V2.3 V3.4 X1.1 | length 71.2
  Top Layer w0.3: V2.3 v1(9.75,30.45) ; V1.2 20.865,28.635 21.25,28.25 v1(22.135,28.25) ; V1.3 v1(22.135,28.25) ; V1.4 23.405,28.635 23.02,28.25 v1(22.135,28.25)
  Top Layer w0.6: v1(54.5,67) v1(54.5,92.75) ; v1(57,56.5) v1(57,61.5)
  Bottom Layer w0.3: v1(9.75,30.45) 9.775,30.475 11.05,30.475 C10.2 ; V3.4 18.45,20.25 22.575,20.25 24.125,21.8 24.15,21.8 24.325,21.975 C14.2 C14.2@24.5,21.8 ; R21.1 21.25,6.25 22.25,7.25 27.95,7.25 MCU1.39 ; v1(22.135,28.25) 24.075,28.25 24.125,28.2 24.15,28.2 24.325,28.025 C12.2 ; R15.2@25.5,25.2 R15.2 25.713,25.038 25.713,26.213 v1(25.75,26.25)
  Bottom Layer w1: C11.1 11.45,24.333 11.796,23.987 14.713,23.987 V3.4
+12V: C13.1 C15.2 TP4.1 V3.1 V3.2 X3.1 | length 22.6
  Top Layer w1: X3.1 16.25,14.25 19,17 V3.1 16.7,18.6 V3.2
  Bottom Layer w0.3: C15.2 12,16 14.861,18.861 14.861,20.161 14.975,20.275 V3.2
  Bottom Layer w1: C13.1 11.475,20.275 V3.2@14.975,20.275
Countdown_ADC: MCU1.31 R4.2 | length 80.4
  Top Layer w0.3: MCU1.31 33.59,26.41 35.25,24.75 35.25,4.75 39,1 78.75,1 80,2.25 R4.2
DAC_OUT: R3.1 X1.5 | length 46.5
  Top Layer w0.5: X1.5 61.63,45.87 65.96,41.54 R3.1
Earth: L1.1 LCD1.MH Mount1.1 Mount2.1 Mount3.1 Mount4.1 S1.X U3.MH | length 5.1
  Top Layer w0.5: L1.1 Mount2.1
GAIN1: J1.1 U1.1 | length 29.2
  Bottom Layer w0.3: J1.1 47.29,57.54 48.5,58.75 71.5,58.75 72.781,57.469 U1.1
GAIN2: R6.2 U1.8 | length 1.5
  Bottom Layer w0.3: R6.2 U1.8
GND: C4.2 C5.1 C7.1 C8.1 C9.1 C10.1 C11.2 C12.1 C13.2 C14.1 C15.1 D1.2 D2.2 D3.2 D4.2 D5.2 H2.2 L1.2 LCD1.1 LCD1.5 LCD1.16 MCU1.3 MCU1.8 MCU1.13 MCU1.18 MCU1.23 MCU1.28 MCU1.33 MCU1.38 R1.1 R2.3 R3.3 R4.3 R8.1 R12.1 R17.1 S1.1 S2.1 T1.2 T1.GND TP5.1 U1.2 U1.4 U2.1 U3.GND V1.1 V1.9 V2.1 V3.3 X1.7 X1.10 X2.1 X3.2 X3.3 | length 31.5
  Top Layer w0.3: V2.1 8.75,35.2 v1(8.75,37) ; v1(9.75,50) 12.4,50 13,50 13.2,50.2 T1.2 ; v1(14,50) T1.GND@14,50.8 ; T1.GND@14.8,50.8 14.8,50.2 15,50 15.6,50 v1(18.25,50) ; v1(18.25,41.5) 18.262,41.488 19.787,41.488 U2.1 ; V1.1 19.595,28.513 19.75,28.358 v1@19.75,28.25 ; D5.2@23.55,6.2 v1@24.95,6.2
  Top Layer w0.5: v1(94.5,86.25) L1.2
  Bottom Layer w0.3: v1(6.25,48.5) C7.1 ; v1(6.25,51.5) C5.1 ; v1(8.25,16) C15.1 ; C10.1 v1(13.5,30.5) ; C9.1 v1(13.5,32.75) ; v1(14,43.25) 14.038,43.212 14.038,42.038 R12.1 ; R17.1 C14.1 25.713,21.962 25.713,20.787 v1(25.75,20.75) ; C12.1 v1(26.75,28) ; C8.1 25.713,37.212 25.713,36.037 v1(25.75,36) ; v1(76.75,48.75) R8.1 ; v1(76.75,53.75) 76.76,53.76 77.815,53.76 C4.2
  other v1: 25,6.15 7.05,20.25 7.05,26 19.595,28.25 21.5,32.75
LCD_Backlight: MCU1.5 R5.1 | length 133.3
  Bottom Layer w0.3: MCU1.5 39.04,13.71 33.5,19.25 33.5,54.75 32,56.25 17.75,56.25 15.75,58.25 15.75,73.25 17.75,75.25 48.75,75.25 53.06,79.56 R5.1
LCD_D4: LCD1.11 MCU1.25 | length 110.6
  Top Layer w0.3: MCU1.25 30.15,41.65 33.75,45.25 33.75,55 32.5,56.25 8.25,56.25 4.75,59.75 4.75,76.75 10.75,82.75 24.75,82.75 33,91 41.5,91 42.9,92.4 LCD1.11
LCD_D5: LCD1.12 MCU1.26 | length 115
  Top Layer w0.3: MCU1.26 30.36,39.11 34.5,43.25 34.5,55.25 32.75,57 8.5,57 5.75,59.75 5.75,76.5 11.25,82 25.25,82 33.25,90 43.25,90 45.44,92.19 LCD1.12
LCD_D6: LCD1.13 MCU1.27 | length 119.5
  Top Layer w0.3: MCU1.27 30.82,36.57 35.25,41 35.25,55.5 33,57.75 9,57.75 6.75,60 6.75,76.25 11.5,81 25.5,81 33.5,89 45.25,89 47.98,91.73 LCD1.13
LCD_D7: LCD1.14 MCU1.29 | length 127.3
  Top Layer w0.3: MCU1.29 33.24,31.49 36.25,34.5 36.25,56 33.5,58.75 9.25,58.75 7.75,60.25 7.75,75.5 12.25,80 25.75,80 34,88.25 46.5,88.25 50.52,92.27 LCD1.14
LCD_EN: LCD1.6 MCU1.24 | length 98.3
  Top Layer w0.3: MCU1.24 30.69,44.19 33,46.5 33,54.75 32.25,55.5 7.75,55.5 4,59.25 4,77 10.75,83.75 24.75,83.75 30.2,89.2 LCD1.6
LCD_RS: LCD1.4 MCU1.20 | length 90.4
  Top Layer w0.3: v1(25.12,77.5) 24.12,76.5 10.5,76.5 8.75,74.75 8.75,60.75 10,59.5 35.75,59.5 43.44,51.81 MCU1.20
  Bottom Layer w0.3: v1(25.12,77.5) LCD1.4
LCD_VO: LCD1.3 R2.2 | length 150.8
  Top Layer w0.3: LCD1.3 22.58,92.08 21.25,90.75 12.75,90.75 2.5,80.5 2.5,59 6.75,54.75 31.409,54.75 31.659,54.5 v1(31.75,54.5)
  Bottom Layer w0.3: v1(31.75,54.5) 31.75,11.75 36.25,7.25 55.75,7.25 56.671,8.171 56.671,8.279 57,8.608 R2.2
LED_G: MCU1.6 R19.1 | length 2.9
  Bottom Layer w0.3: MCU1.6 R19.1
LED_R: MCU1.9 R16.1 | length 2.9
  Bottom Layer w0.3: MCU1.9 R16.1
LED_W: MCU1.4 R20.1 | length 2.9
  Bottom Layer w0.3: MCU1.4 R20.1
LED_Y: MCU1.7 R18.1 | length 2.9
  Bottom Layer w0.3: MCU1.7 R18.1
NetC1_1: C1.1 C2.2 U1.5 | length 20.3
  Top Layer w0.5: C1.1 75,44.25 79.44,48.69 U1.5 80.719,44.571 C2.2
NetC2_1: C2.1 R1.2 | length 4.9
  Top Layer w0.5: R1.2 84.489,35.5 85.029,34.96 C2.1
NetC3_1: C3.1 J1.2 | length 35.4
  Bottom Layer w0.3: J1.2 44.75,57.75 46.75,59.75 72.5,59.75 74,58.25 74,56.5 74.19,56.31 C3.1
NetC3_2: C3.2 R6.1 | length 1.4
  Bottom Layer w0.3: C3.2 R6.1
NetC4_1: C4.1 U1.7 | length 1.5
  Bottom Layer w0.3: C4.1 U1.7
NetC6_1: C6.1 R8.2 U1.3 | length 4
  Bottom Layer w0.5: U1.3 72.809,51.202 75.223,51.202 C6.1 R8.2
NetC6_2: C6.2 R3.2 | length 43.7
  Top Layer w0.5: R3.2 68.5,34.5 71.75,37.75 71.75,44.25 75.25,47.75 v1(75.25,48.75)
  Bottom Layer w0.5: v1(75.25,48.75) C6.2
NetD1_1: D1.1 R18.2 | length 26
  Bottom Layer w0.3: R18.2 52.29,18.79 53,19.5 53,23.5 54,24.5 66.5,24.5 69.5,27.5 D1.1
NetD2_1: D2.1 R16.2 | length 5.3
  Bottom Layer w0.3: R16.2 51.305,23.87 51.87,23.87 54.5,26.5 54.5,27.02 D2.1
NetD3_1: D3.1 R19.2 | length 8.1
  Bottom Layer w0.3: R19.2 52.75,16.25 54.73,18.23 D3.1
NetD4_1: D4.1 R20.2 | length 24.5
  Bottom Layer w0.3: R20.2 52.17,11.17 63,22 D4.1
NetD5_1: D5.1 R21.2 | length 5.3
  Top Layer w0.3: D5.1 v1(25,4.35)
  Bottom Layer w0.3: R21.2 21.263,4.338 24.987,4.338 v1(25,4.35)
NetLCD1_15: LCD1.15 R5.2 | length 5.6
  Bottom Layer w0.3: R5.2 LCD1.15
NetR11_2: R11.2 U2.7 U2.8 | length 5.9
  Top Layer w0.3: U2.7 25.075,40.825 25.25,41 v1(25.25,41.5) 25.238,41.488 23.713,41.488 U2.8
  Bottom Layer w0.3: v1(25.25,41.5) 25.25,43.159 25.391,43.3 25.5,43.3 25.675,43.475 R11.2
NetR15_1: R15.1 R17.2 V3.5 | length 7
  Bottom Layer w0.3: V3.5 19.2,25.2 24.15,25.2 24.325,25.025 R15.1 R17.2
Override_SW: MCU1.1 S1.2 | length 99
  Bottom Layer w0.3: MCU1.1 88.05,3.55 96.75,12.25 96.75,41 86.45,51.3 S1.2
Pico_RX0: MCU1.17 X1.3 | length 8.6
  Top Layer w0.3: MCU1.17 49.25,46.55 49.25,49 51.2,50.95 X1.3
Pico_RX1: MCU1.12 U3.8 | length 42.2
  Bottom Layer w0.3: U3.8 32.99,57.76 37,53.75 37,33 38.51,31.49 MCU1.12
Pico_TX0: MCU1.16 X1.2 | length 13.6
  Bottom Layer w0.3: MCU1.16 49.49,44.25 49.49,51.73 X1.2
Pico_TX1: MCU1.11 U3.10 | length 46.4
  Bottom Layer w0.3: U3.10 35.5,62.95 35.5,56.75 38,54.25 38,34.5 39.75,32.75 48.25,32.75 49,32 49,29.5 48.45,28.95 MCU1.11
Prompt_SW: MCU1.2 S2.2 | length 45.1
  Bottom Layer w0.3: MCU1.2 84.09,6.09 85.75,7.75 85.75,10.75 86.5,11.5 S2.2
SPEAKER+: C1.2 X2.2 | length 18.6
  Bottom Layer w0.5: C1.2 82.25,38.25 91,38.25 93,36.25 X2.2
ToF_GPIO1: R10.1 T1.7 | length 4.1
  Top Layer w0.3: T1.7 17.5,49.2 v1(18.25,48.45)
  Bottom Layer w0.3: v1(18.25,48.45) 18.275,48.475 19.3,48.475 R10.1
pads on no net: LCD1.7 LCD1.8 LCD1.9 LCD1.10 MCU1.10 MCU1.14 MCU1.15 MCU1.19 MCU1.30 MCU1.32 MCU1.34 MCU1.35 MCU1.36 MCU1.37 MCU1.40 T1.8 U3.1 U3.3 U3.5 U3.7 U3.11 U3.12 U3.13 U3.15 U3.16 U3.17 U3.18 U3.19 U3.21 U3.22 U3.23 U3.24 U3.26 U3.27 U3.28 U3.29 U3.31 U3.32 U3.33 U3.35 U3.36 U3.37 U3.38 U3.40 V1.8 X1.4 X1.6 X1.8 X1.9 X1.11 X1.12 X1.13 X1.14 X1.15 X1.16

## Polygon pours and split planes (outlines as drawn)
+3V3 on Power Layer "+3V3 Poly 1" (solid, remove dead copper, pour order 15): 83,57.5 90,57.5 90,5 64.5,5 64.5,33 83,33
Earth on Power Layer "Earth Poly" (solid, remove dead copper, pour order 18): 0,0 0,99 99,99 99,0
+5V on Power Layer "Pi Zero +5V Poly" (solid, pour order 14): 24,67.5 24,61 75,61 75,67.5
+5V on Power Layer "LCD +5V Poly" (solid, remove dead copper, pour order 13): 16.25,97 16.25,92 57,92 57,97
+3V3 on Power Layer "+3V3 Poly 2" (solid, remove dead copper, pour order 17): 49.25,57.5 49.25,10.75 27,10.75 27,32.25 17.75,32.25 17.75,44 2.25,44 2.25,57.5
+12V on Power Layer "+12V Poly" (solid, remove dead copper, pour order 11): 2.25,22 2.25,19.413 9,19.413 9,12.5 20.5,12.5 20.5,22
+1V8 on Power Layer "+1V8 Poly" (solid, remove dead copper, pour order 12): 2.25,43.5 2.25,32.25 17,32.25 17,43.5
+5V on Power Layer "+5V Poly 1" (solid, pour order 16): 6.75,31.75 6.75,26.338 2.25,26.338 2.25,22.75 22,22.75 22,5 63.5,5 63.5,34 82,34 82,57.5 50,57.5 50,34 54,34 54,10 26.25,10 26.25,31.75
GND on Ground Layer "GND Poly" (solid, pour order 10): 0,0 0,99 99,99 99,0
GND on Top Layer "Top GND Poly" (hatched 45Degree grid 0.508 track 0.203, remove dead copper, pour order 20): 0,0 99,0 99,99 0,99
GND on Bottom Layer "Bottom GND Poly" (hatched 45Degree grid 0.508 track 0.203, remove dead copper, pour order 19): 0,0 99,0 99,99 0,99

## Keep-outs
Keep-Out Layer:
  the board outline again, w0.2

## Other copper
Power Layer:
  pour cut-out: 50.181,57.5 48.931,57.5 48.931,55.5 50.181,55.5
  pour cut-out: 83.237,57.4 81.987,57.4 81.987,55.4 83.237,55.4
  pour cut-out: 63.375,4.75 64.625,4.75 64.625,6.75 63.375,6.75
  pour cut-out: 20.625,12.5 21.875,12.5 21.875,14.5 20.625,14.5
Bottom Layer:
  region net GND: 76.125,27.111 76.125,27.5 77.51,27.5 77.51,27.498 77.511,27.498 77.511,26.114 76.125,26.114 76.125,27.11
  region net GND: 82.189,19.182 81.67,19.182 81.67,20.568 83.055,20.568 83.055,20.566 83.057,20.566 83.057,19.182 82.19,19.182
  region net GND: 85.83,20.458 85.83,19.182 84.443,19.182 84.443,20.566 84.445,20.566 84.445,20.568 85.83,20.568 85.83,20.46
  region net GND: 80.309,28.886 81.67,28.886 81.67,27.5 85.83,27.5 85.83,28.886 87.216,28.886 87.216,26.114 85.83,26.114 85.83,23.341 87.216,23.341 87.216,26.114 89.989,26.114 89.989,24.729 89.987,24.729 89.987,24.727 88.602,24.727 88.602,23.341 89.987,23.341 89.987,23.339 89.989,23.339 89.989,21.955 91.375,21.955 91.375,19.182 89.989,19.182 89.989,20.568 88.604,20.568 88.604,20.57 88.602,20.57 88.602,21.955 87.216,21.955 87.216,20.57 87.214,20.57 87.214,20.568 85.83,20.568 85.83,21.955 81.67,21.955 81.67,20.568 80.286,20.568 80.286,20.57 80.284,20.57 80.284,21.955 78.898,21.955 78.898,20.57 78.896,20.57 78.896,20.568 77.511,20.568 77.511,19.182 76.125,19.182 76.125,21.955 77.511,21.955 77.511,23.339 77.513,23.339 77.513,23.341 78.898,23.341 78.898,24.727 77.513,24.727 77.513,24.729 77.511,24.729 77.511,26.114 80.284,26.114 80.284,23.341 81.67,23.341 81.67,26.114 80.284,26.114 80.284,28.886 80.307,28.886
  region net GND: 89.989,26.541 89.989,27.498 89.99,27.498 89.99,27.5 91.375,27.5 91.375,26.114 89.989,26.114 89.989,26.539

## Silkscreen, mask and mechanical layers (free items; w line width, h text height)
Top Overlay:
  drawing of 25 lines, arcs and shapes, not listed
  text "100dB" at 43.771,57.95 h1
  text "Door Sensor" at 9.4,56.4 h1.8
  text "V3" at 31.9,56.4 h1.8
  text "ToF Sensor" at 9.252,53 h1
  text "SCL" at 13.25,41.29 h1
  text "+1V8" at 3.501,41.27 h1
  text "Override / Switch" at 87.353,40.341 h1.2
  text "SDA" at 13.25,38.75 h1
  text "GND" at 4.334,38.73 h1
  text "+" at 97.6,33.98 h1.2
  text "1V8" at 1.8,31 h1 r90
  text "-" at 97.6,28.9 h1.2
  text "3V3" at 1.8,27.167 h1 r90
  text "Override / Active" at 75,25.32 h1.2
  text "Lab Closed" at 58.5,25.07 h1.2
  text "5V" at 1.8,23.917 h1 r90
  text "SPK / (8ohm)" at 87.876,22.041 h1.2
  text "Countdown / Active" at 75,20.02 h1.2
  text "Lab Open" at 58.5,19.82 h1.2
  text "12V" at 1.8,19.75 h1 r90
  text "GND" at 1.8,15.917 h1 r90
  text "12VDC" at 2.501,11.672 h1
  text "Prompt / Mode" at 89.75,9.32 h1.2
  text "PWR" at 22.167,2.25 h1
  text "LCD / Contrast" at 52.401,1.571 h1.2
  text "Prompt / Volume" at 63.901,1.391 h1.2
  text "Countdown / Length" at 74.602,1.391 h1.2
Bottom Overlay:
  drawing of 18 lines, arcs and shapes, not listed
  text "M3" at 5.504,85.896 h1.2
  text "Board" at 93,77.05 h1.2
  text "Dim" at 93,75.25 h1.2
  text "99mm" at 94.5,74.826 h1.2 r270
  text "99mm" at 92.324,72.8 h1.2
  text "Designed by / Russell MacGregor" at 68.531,29.504 h1
Bottom Paste:
  region: 89.989,26.541 89.989,27.498 89.99,27.498 89.99,27.5 91.375,27.5 91.375,26.114 89.989,26.114 89.989,26.539
  region: 76.125,27.111 76.125,27.5 77.51,27.5 77.51,27.498 77.511,27.498 77.511,26.114 76.125,26.114 76.125,27.11
  region: 82.189,19.182 81.67,19.182 81.67,20.568 83.055,20.568 83.055,20.566 83.057,20.566 83.057,19.182 82.19,19.182
  region: 85.83,20.458 85.83,19.182 84.443,19.182 84.443,20.566 84.445,20.566 84.445,20.568 85.83,20.568 85.83,20.46
  region: 80.309,28.886 81.67,28.886 81.67,27.5 85.83,27.5 85.83,28.886 87.216,28.886 87.216,26.114 85.83,26.114 85.83,23.341 87.216,23.341 87.216,26.114 89.989,26.114 89.989,24.729 89.987,24.729 89.987,24.727 88.602,24.727 88.602,23.341 89.987,23.341 89.987,23.339 89.989,23.339 89.989,21.955 91.375,21.955 91.375,19.182 89.989,19.182 89.989,20.568 88.604,20.568 88.604,20.57 88.602,20.57 88.602,21.955 87.216,21.955 87.216,20.57 87.214,20.57 87.214,20.568 85.83,20.568 85.83,21.955 81.67,21.955 81.67,20.568 80.286,20.568 80.286,20.57 80.284,20.57 80.284,21.955 78.898,21.955 78.898,20.57 78.896,20.57 78.896,20.568 77.511,20.568 77.511,19.182 76.125,19.182 76.125,21.955 77.511,21.955 77.511,23.339 77.513,23.339 77.513,23.341 78.898,23.341 78.898,24.727 77.513,24.727 77.513,24.729 77.511,24.729 77.511,26.114 80.284,26.114 80.284,23.341 81.67,23.341 81.67,26.114 80.284,26.114 80.284,28.886 80.307,28.886
Bottom Solder:
  region: 89.989,26.541 89.989,27.498 89.99,27.498 89.99,27.5 91.375,27.5 91.375,26.114 89.989,26.114 89.989,26.539
  region: 76.125,27.111 76.125,27.5 77.51,27.5 77.51,27.498 77.511,27.498 77.511,26.114 76.125,26.114 76.125,27.11
  region: 82.189,19.182 81.67,19.182 81.67,20.568 83.055,20.568 83.055,20.566 83.057,20.566 83.057,19.182 82.19,19.182
  region: 85.83,20.458 85.83,19.182 84.443,19.182 84.443,20.566 84.445,20.566 84.445,20.568 85.83,20.568 85.83,20.46
  region: 80.309,28.886 81.67,28.886 81.67,27.5 85.83,27.5 85.83,28.886 87.216,28.886 87.216,26.114 85.83,26.114 85.83,23.341 87.216,23.341 87.216,26.114 89.989,26.114 89.989,24.729 89.987,24.729 89.987,24.727 88.602,24.727 88.602,23.341 89.987,23.341 89.987,23.339 89.989,23.339 89.989,21.955 91.375,21.955 91.375,19.182 89.989,19.182 89.989,20.568 88.604,20.568 88.604,20.57 88.602,20.57 88.602,21.955 87.216,21.955 87.216,20.57 87.214,20.57 87.214,20.568 85.83,20.568 85.83,21.955 81.67,21.955 81.67,20.568 80.286,20.568 80.286,20.57 80.284,20.57 80.284,21.955 78.898,21.955 78.898,20.57 78.896,20.57 78.896,20.568 77.511,20.568 77.511,19.182 76.125,19.182 76.125,21.955 77.511,21.955 77.511,23.339 77.513,23.339 77.513,23.341 78.898,23.341 78.898,24.727 77.513,24.727 77.513,24.729 77.511,24.729 77.511,26.114 80.284,26.114 80.284,23.341 81.67,23.341 81.67,26.114 80.284,26.114 80.284,28.886 80.307,28.886
Poly Planning:
  lines w0.1: 1.25,32.25 17,32.25 17,43.5 1.25,43.5 1.25,32.25 ; 1.25,44 17.75,44 17.75,32.25 27,32.25 27,10.75 49.25,10.75 49.25,57.5 1.25,57.5 1.25,44 ; 2.25,19.413 2.25,22 20.5,22 20.5,20.25 20.5,16.75 20.5,12.5 9,12.5 9,19.413 2.25,19.413 ; 2.25,22.75 22,22.75 22,5 63.5,5 63.5,34 82,34 82,57.5 50,57.5 50,34 54,34 54,10 26.25,10 26.25,31.75 6.75,31.75 6.75,26.338 2.25,26.338 2.25,23.75 2.25,22.75 ; 16.25,92 57,92 57,97 16.25,97 16.25,92 ; 24,61 75,61 75,67.5 24,67.5 24,61 ; 64.5,5 64.5,33 83,33 83,57.5 90,57.5 90,33 90,5 64.5,5 ; 90,97.5 90,97.5

## Text inside footprints (layer, text, board x,y; h text height)
C1: Top Overlay "+" at 72.85,44.9 h1.2; Top Overlay "+" at 74.6,43.4 h1.2
C11: Bottom Overlay "+" at 12.417,27.155 h1.5
C13: Bottom Overlay "+" at 12.417,21.405 h1.5
X1: Top Overlay "DFPlayer Mini MP3 Player" at 54.442,41.911 h1.5